# Altium PCB LINEAR POWER SUPPLY 0-30V_v1.PcbDoc
Units mm, origin at the board's own origin, x right, y up, seen from the top; angles counter-clockwise.
Board outline 115 x 60 mm, 2 copper layers (Top Layer, Bottom Layer); 52 components, 32 nets, 135 pads, 0 vias.
Unrouted connection lines stored in the file: 1.
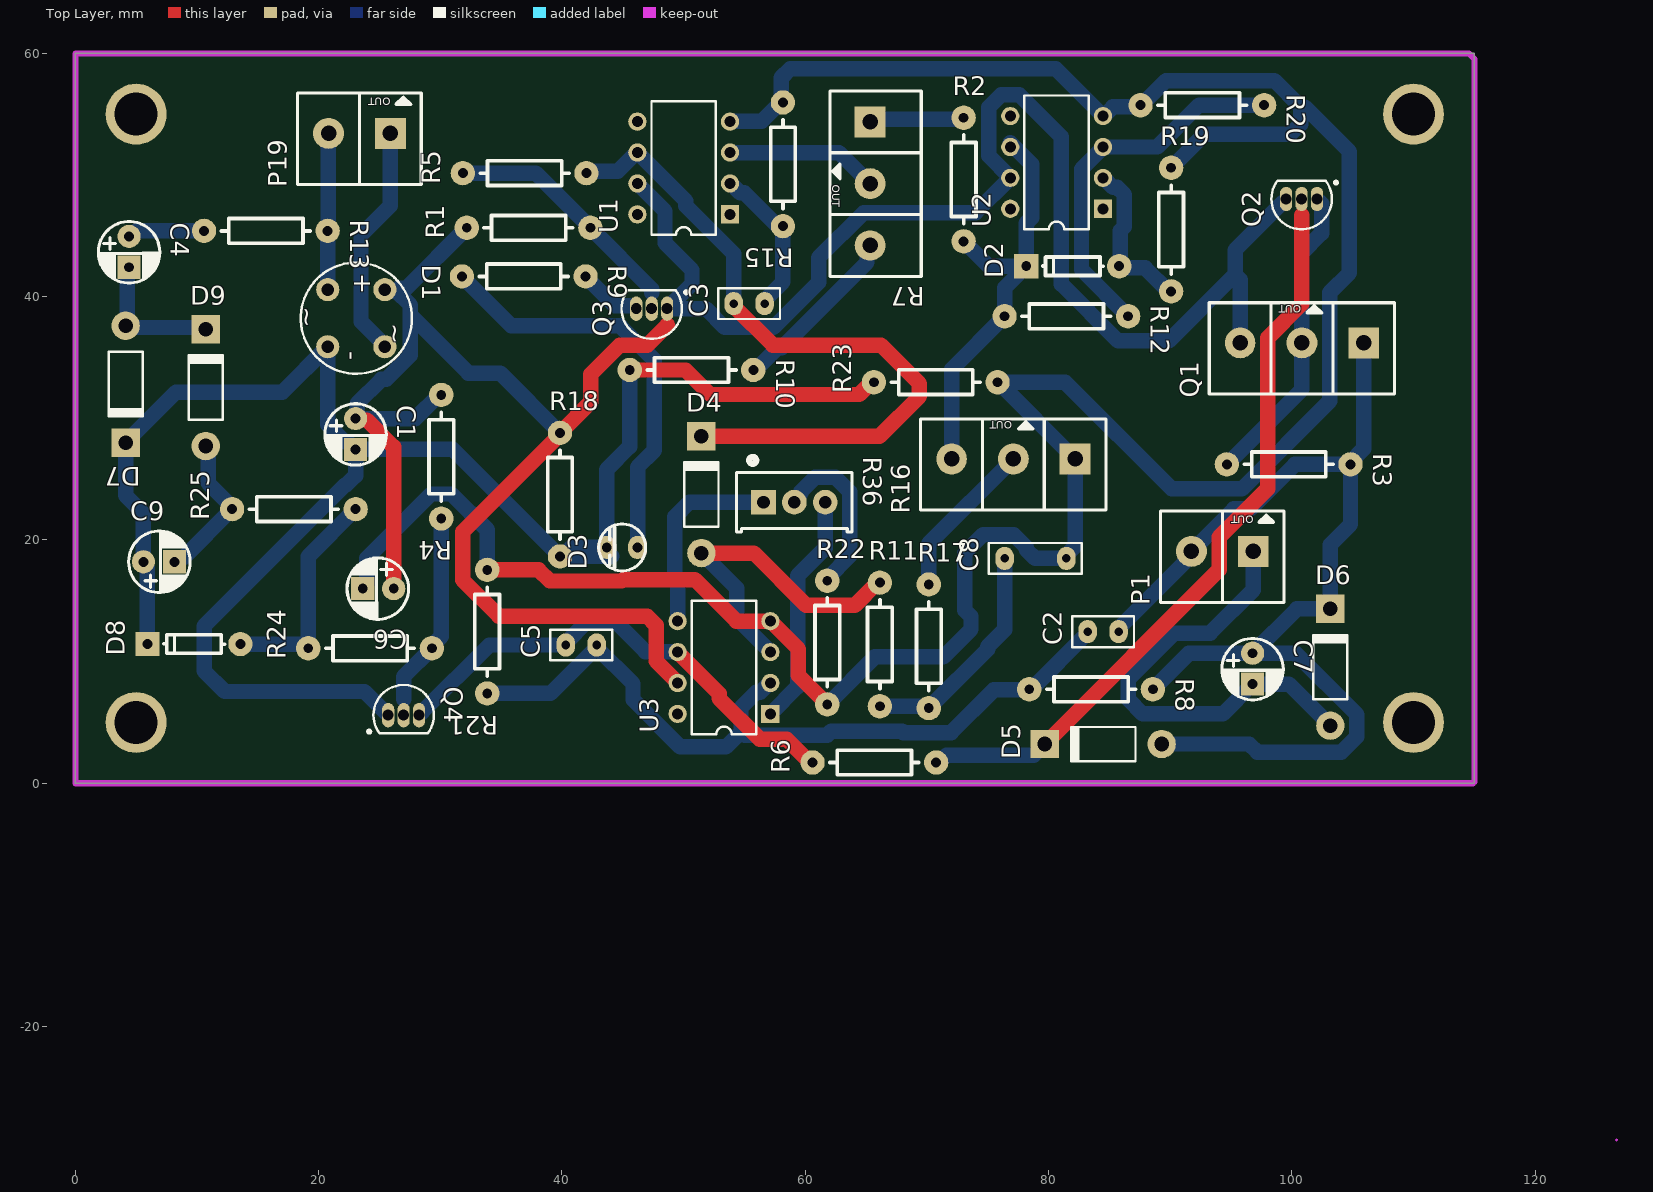
[diagram p0: Top Layer view]
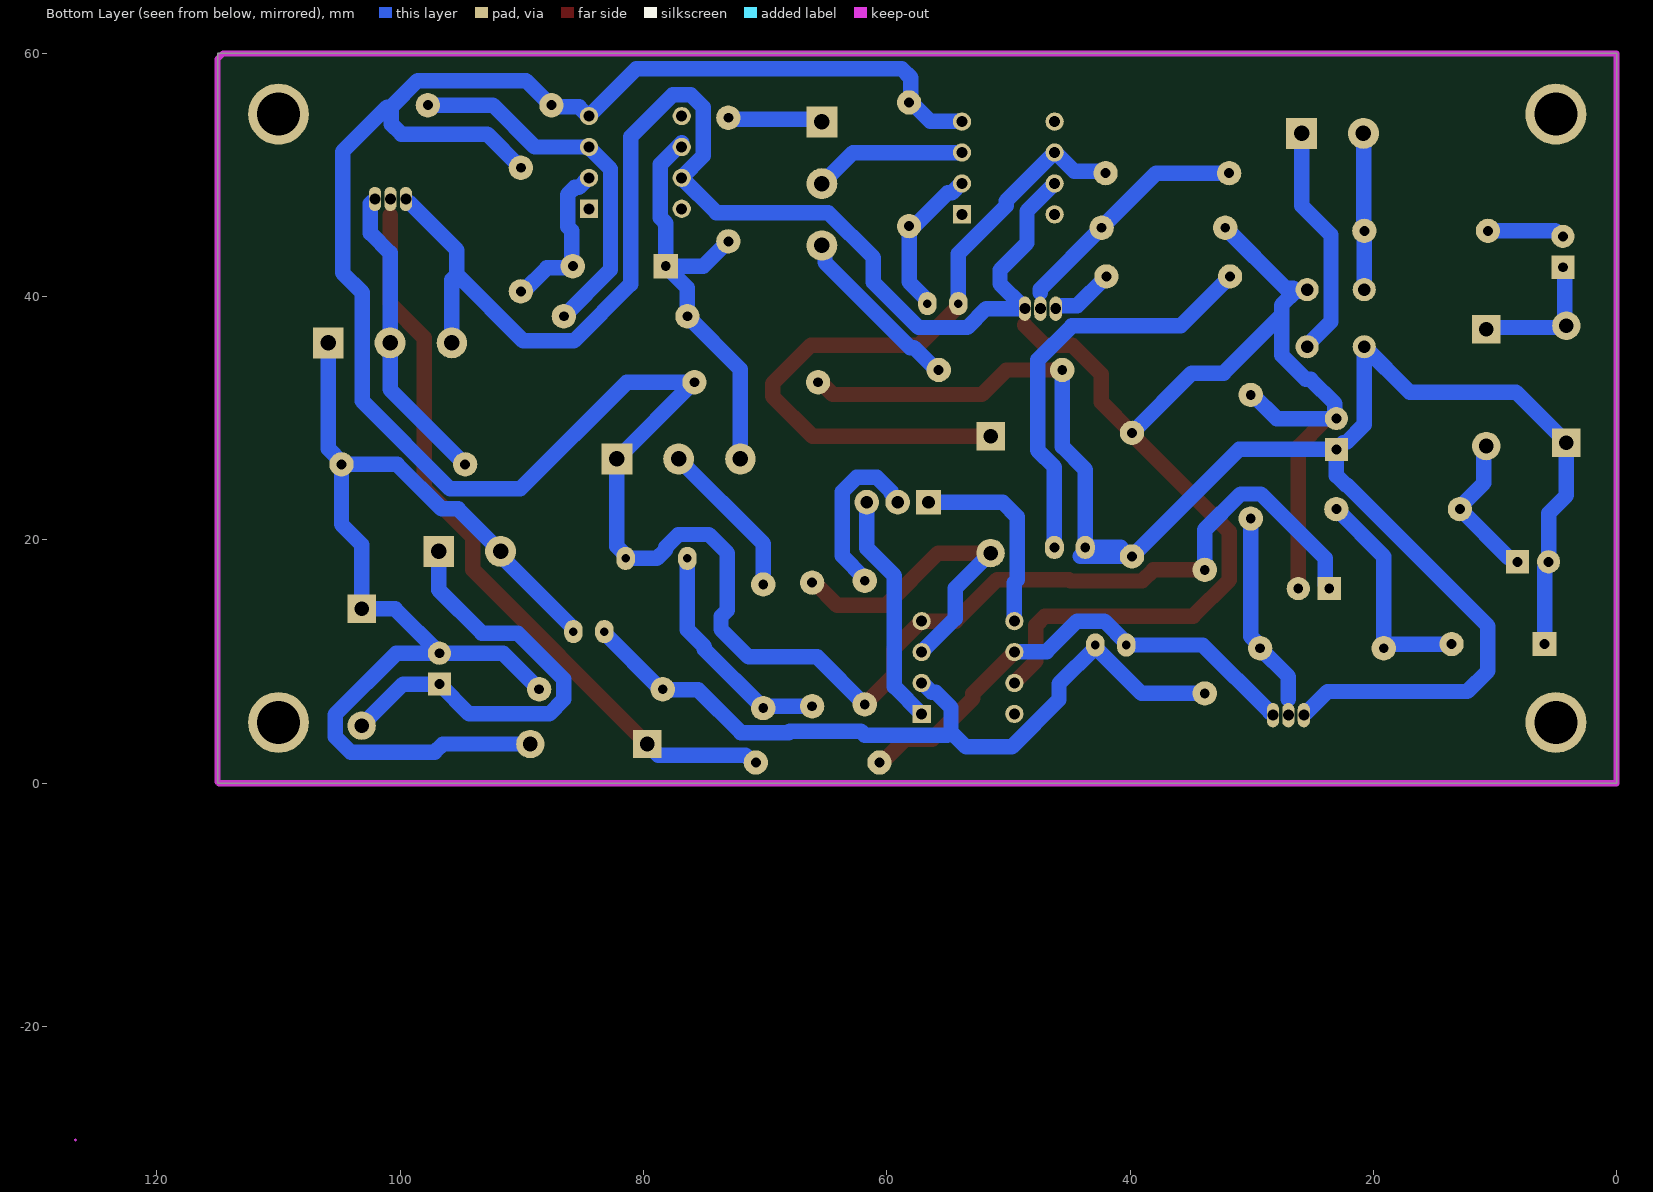
[diagram p1: Bottom Layer view, seen from below]
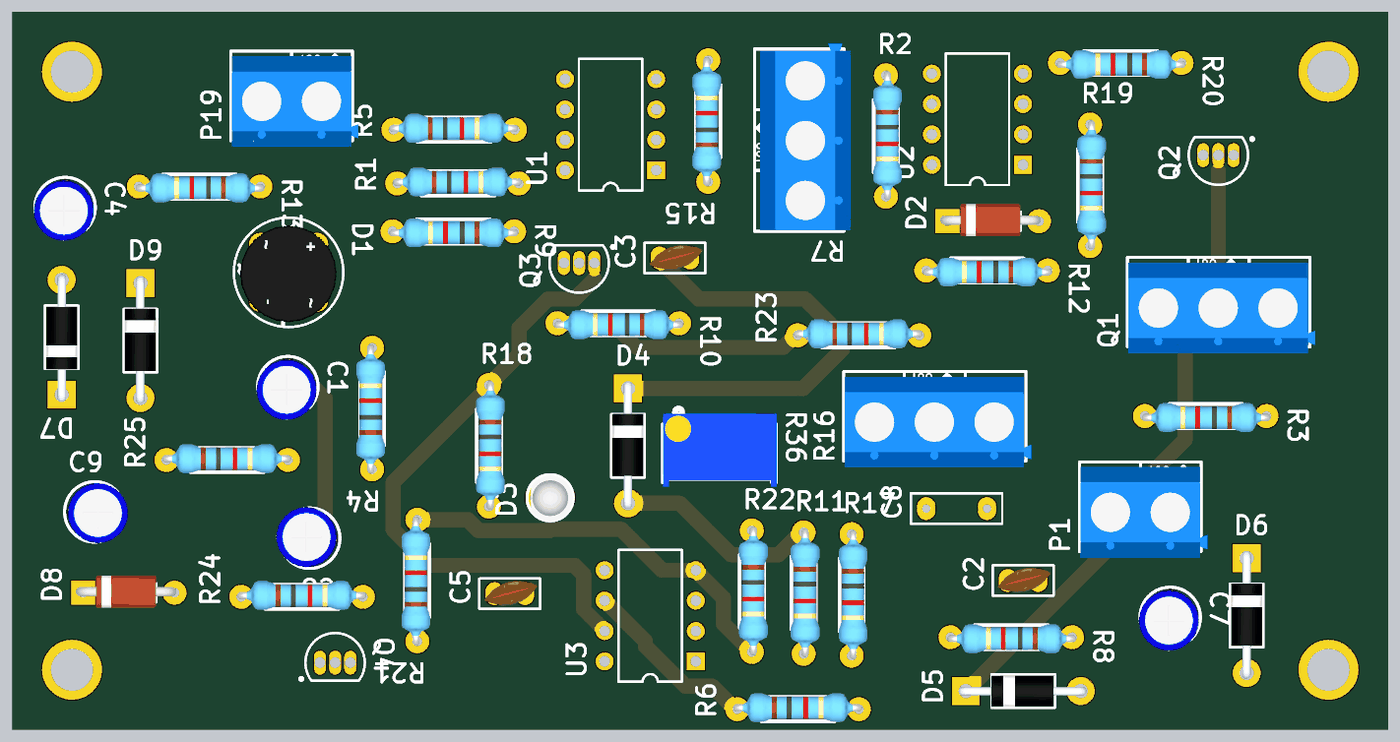
[diagram p2: 3D render of the assembled board from above, using the file's embedded part models]

## Layer stack, top to bottom
Top Solder: solder mask 0.0102, Solder Resist, Dk 3.5
Top Layer: signal copper 0.0356
Dielectric 1: dielectric 0.32, FR-4, Dk 4.8
Bottom Layer: signal copper 0.0356
Bottom Solder: solder mask 0.0102, Solder Resist, Dk 3.5

## Board outline
0,0 115,0 115,60 0,60

## Design rules (kind name [scope] priority, off if disabled: settings)
Clearance POLYGON [InPolygon] p1: gap=0.635 ignorepadtopadclearanceinfootprint=FALSE except(0: Arc-Hole Track-Hole SMDPad-Hole THPad-Hole Via-Hole Fill-Hole Poly-Hole Region-Hole Text-Hole)
Clearance [All] p2: gap=0.381 ignorepadtopadclearanceinfootprint=FALSE except(0: Arc-Hole Track-Hole SMDPad-Hole THPad-Hole Via-Hole Fill-Hole Poly-Hole Region-Hole Text-Hole)
PlaneConnect [All] p1: planeconnectstyle=Direct reliefexpansion=0.508 reliefentries=4 reliefconductorwidth=0.254 reliefairgap=0.254
PolygonConnect [All] p1: connectstyle=Direct reliefconductorwidth=0.254 reliefentries=4 polygonreliefangle="90 Angle" airgapwidth=0.254
RoutingVias [All] p1: holewidth=0.711 width=1.27 viastyle="Through Hole" minholewidth=0.711 minwidth=1.27 maxholewidth=0.711 maxwidth=1.27
SolderMaskExpansion [All] p1: expansion=0.102 istentingtop=FALSE
Width [All] p1: maxlimit=1.27 minlimit=0.254 preferedwidth=2.54
29 further rules are at their usual default settings.

## Components (designator, comment, footprint, x,y, rotation, side; value= is the part's Value field where it differs from the comment)
C1 "4.7uF" "Rad.1/.2-SMALL - duplicate" 23.038,28.708 r270 top
C2 "100pF / CERAMIC" RAD-0.1_cap 84.48,12.464 r180 top
C3 "330 pf /CERAMIC" RAD-0.1_cap 55.383,39.429 r180 top
C4 "47uF/50v" "Rad.1/.2-SMALL - duplicate" 4.421,43.683 r270 top
C5 "100PF / CERAMIC" RAD-0.1_cap 41.582,11.364 r180 top
C6 "200 nf / POLYESTER" "Rad.1/.2-SMALL - duplicate" 24.901,15.998 r180 top
C7 "10uF/50" "Rad.1/.2-SMALL - duplicate" 96.768,9.417 r270 top
C8 "100nF / POLYESTER" "RAD-0.2- duplicate" 81.464,18.479 r180 top
C9 "47uF/50v" "Rad.1/.2-SMALL - duplicate" 6.873,18.201 r0 top
D1 "MB6S" Bridge 23.1,38.229 r270 top
D2 "5.6V" DIODE_ZENER.AXIAL0.3 85.805,42.501 r180 top
D3 "RED" "Led_3mil - RED" 43.684,19.382 r90 top
D4 "1N4148" Dioad_1n400x_2 51.467,23.72 r90 top
D5 "1N4148" Dioad_1n400x_2 84.495,3.224 r180 top
D6 "1N4001" Dioad_1n400x_2 103.162,9.537 r90 top
D7 "1N4148" Dioad_1n400x_2 4.135,32.803 r270 top
D8 "5.6V" DIODE_ZENER.AXIAL0.3 13.572,11.443 r180 top
D9 "1N4148" Dioad_1n400x_2 10.72,32.517 r90 top
P1 "Blue Connector 1*2 -kf301" "Blue Connector 1*2 -kf301" 99.364,22.868 r180 top
P19 "24VDC/3A" "Blue Connector 1*2 -kf301" 28.435,57.228 r180 top
Q1 "2N3055" "Blue Connector 1*3 -kf301" 108.442,39.995 r180 top
Q2 "2N2219" TO-92A 100.797,48.024 r90 top
Q3 "BC557" TO-92A 47.379,39.006 r90 top
Q4 "BC548" TO-92A 26.988,5.593 r270 top
R1 "2.2K" "AXIAL0.4 - 1k" 42.337,45.659 r180 top
R2 "56K" "AXIAL0.4 - 1k" 73.016,44.545 r90 top
R3 "1K" "AXIAL0.4 - 1k" 94.658,26.213 r0 top
R4 "10K" "AXIAL0.4 - 1k" 30.083,31.92 r270 top
R5 "10K" "AXIAL0.4 - 1k" 42.013,50.149 r180 top
R6 "1K" "AXIAL0.4 - 1k" 70.757,1.705 r180 top
R7 "10k" "Blue Connector 1*3 -kf301" 61.535,56.898 r270 top
R8 "56K" "AXIAL0.4 - 1k" 78.413,7.724 r0 top
R9 "3.9K" "AXIAL0.4 - 1k" 31.783,41.657 r0 top
R10 "33R" "AXIAL0.4 - 1k" 45.571,33.969 r0 top
R11 "2.2K" "AXIAL0.4 - 1k" 66.137,6.333 r90 top
R12 "10K" "AXIAL0.4 - 1k" 76.384,38.383 r0 top
R13 "82R/1W" "AXIAL0.4 - 1k" 10.581,45.401 r0 top
R15 "10K" "AXIAL0.4 - 1k" 58.169,55.956 r270 top
R16 "10k" "Blue Connector 1*3 -kf301" 84.72,30.453 r180 top
R17 "27R" "AXIAL0.4 - 1k" 70.152,6.178 r90 top
R18 "2.2K/1W" "AXIAL0.4 - 1k" 39.84,18.642 r90 top
R19 "4.7K" "AXIAL0.4 - 1k" 90.073,40.428 r90 top
R20 "10K" "AXIAL0.4 - 1k" 87.56,55.734 r0 top
R21 "27R" "AXIAL0.4 - 1k" 33.859,17.542 r270 top
R22 "270K" "AXIAL0.4 - 1k" 61.812,6.487 r90 top
R23 "0.47R /5W" "AXIAL0.4 - 1k" 75.805,32.962 r180 top
R24 "1.5K" "AXIAL0.4 - 1k" 29.31,11.094 r180 top
R25 "220R" "AXIAL0.4 - 1k" 23.047,22.532 r180 top
R36 "100k/multiterun" MULTITERN 54.354,20.652 r0 top
U1 "TL081ACN" DIP8 50.01,50.572 r90 top
U2 "TL081ACN" DIP8 80.663,51.029 r90 top
U3 "TL081ACN" DIP8 53.32,9.511 r90 top

## Footprints (in the part's own frame and the unit in brackets; to place one, negate y for a bottom-side part, rotate by r counter-clockwise, add the part's x,y. Pads: shape width x height; smd on the part's side, far side on the other; paste and mask are expansions set on the pad)
"AXIAL0.4 - 1k" [mm]
  round 2 hole 0.813: 1(0,0) 2(10.16,0)
  silkscreen extent 1.44,-1.02 8.73,1.02, body extent -0.26,-1.33 10.5,1.07, height 2.41
"Blue Connector 1*2 -kf301" [mm]
  rect 2.54x2.54 hole 1.27: 1(2.54,3.81)
  round 2.54 hole 1.27: 2(7.62,3.81)
  silkscreen extent 0,0.5 10.16,8, body extent -0.51,0.9 10.09,8.5, height 10
"Blue Connector 1*3 -kf301" [mm]
  rect 2.54x2.54 hole 1.27: 1(2.534,3.798)
  round 2.54 hole 1.27: 2(7.614,3.798)
  oval 2.5x2.54 hole 1.27: 3(12.694,3.798)
  silkscreen extent -0.01,0.5 15.23,8, body extent -0.44,0.95 15.16,8.55, height 10
Bridge [mm]
  round 1.905 hole 1.016: 1(-2.35,2.35) 2(-2.35,-2.35) 3(2.35,-2.35) 4(2.35,2.35)
  silkscreen extent -4.57,-4.57 4.57,4.57, body extent -3.92,-4.06 4.18,4.04, height 5.21
Dioad_1n400x_2 [mm] "Diode, Axial; Body 5.2 x 2.7 mm (LxDia. max), Lead Dia. 0.86 mm (max)"
  round 2.337 hole 1.2: 1(-4.8,0)
  rect 2.337x2.337 hole 1.2: 2(4.8,0)
  silkscreen extent -2.65,-1.4 2.75,1.4, body extent -5.27,-1.29 5.43,1.32, height 1.3
DIODE_ZENER.AXIAL0.3 [mm]
  round 2 hole 0.813: A(0,0)
  rect 2x2 hole 0.813: K(7.642,0)
  silkscreen extent 1.31,-0.76 6.29,0.76, body extent -0.14,-1.44 8.27,1.23, height 2.83
DIP8 [mm] "DIP; 8 Leads; Row Spacing 7.62 mm; Pitch 2.54 mm"
  rect 1.5x1.5 hole 0.9: 1(-3.81,-3.81)
  round 1.5 hole 0.9: 2(-1.27,-3.81) 3(1.27,-3.81) 4(3.81,-3.81) 5(3.81,3.81) 6(1.27,3.81) 7(-1.27,3.81) 8(-3.81,3.81)
  silkscreen extent -5.5,-2.65 5.5,2.65
"Led_3mil - RED" [mil]
  oval 75x62 hole 32: 1(0,-100) 2(0,0)
  silkscreen extent -76,-126 76,26, body extent -76,-125 74,12, height 216
MULTITERN [mil]
  rect 80x80 hole 41: 1(87.01,96.46)
  round 80 hole 41: 2(187.01,96.46) 3(287.01,96.46)
  silkscreen extent 0,0 374,243, body extent 1,-13 376,227, height 455
RAD-0.1_cap [mm] "Radial Cap, Thru-Hole; 2 Leads; 0.1 in Pin Spacing"
  oval 1.524x1.905 hole 0.7: 1(-1.27,0) 2(1.27,0)
  silkscreen extent -2.54,-1.27 2.54,1.27, body extent -2.3,-1.08 2.1,1, height 5.08
"RAD-0.2- duplicate" [mm] "Radial Cap, Thru-Hole; 2 Leads; 0.1 in Pin Spacing"
  oval 1.524x1.905 hole 0.7: 1(0,0) 2(5.08,0)
  silkscreen extent -1.27,-1.27 6.38,1.27
"Rad.1/.2-SMALL - duplicate" [mil]
  round 75 hole 32: 1(-50,0)
  rect 75x75 hole 32: 2(50,0)
  silkscreen extent -98,-103 101,103, body extent -88,-103 111,95, height 454
TO-92A [mm] "TO, Flat Index; 3 In-Line, Axial Leads; Body Dia. 4.5mm; Leads 0.51 x 0.48 mm (max)"
  oval 2x1 hole 0.9: 1(0,-1.27) 2(0,0) 3(0,1.27)
  silkscreen extent -2.48,-2.96 1.5,2.48, body extent -2.48,-2.5 1.5,2.5, height 6.86

## Part data
C1 C4 C6 C7 C9: library part "Cap Pol1", "Polarized Capacitor (Radial)", LatestRevisionDate=17-Jul-2002, LatestRevisionNote="Re-released for DXP Platform.", PackageDescription="Polarized Capacitor (Radial); 2 Leads", PackageReference=RB7.6-15, Published=8-Jun-2000, Publisher="Altium Limited"
C2 C3 C5 C8: library part Cap, "Capacitor", LatestRevisionDate=17-Jul-2002, LatestRevisionNote="Re-released for DXP Platform.", PackageDescription="Radial Cap, Thru-Hole; 2 Leads; 0.3 in Pin Spacing", PackageReference=RAD-0.3, Published=8-Jun-2000, Publisher="Altium Limited"
D1: library part Bridge1, "Full Wave Diode Bridge", DatasheetVersion=E2732B, LatestRevisionDate=29-May-2009, LatestRevisionNote="Sch pins A & K swapped.", PackageDescription="Bridge Rectifier; 4 Terminals; Body 9.4 x 9.4 mm (typ); Pitch 5.08 mm", PackageReference=D-38, Published=8-Jun-2000, Publisher="Altium Limited"
D2 D8: library part "D Zener", "Zener Diode", LatestRevisionDate=17-Jul-2002, LatestRevisionNote="Re-released for DXP Platform.", PackageDescription="Diode, Thru-Hole; 2 Leads; 0.7 in Pin Spacing", PackageReference=DIODE-0.7, Published=8-Jun-2000, Publisher="Altium Limited"
D3: library part LED0, "Typical INFRARED GaAs LED", LatestRevisionDate=08-Jul-2005, LatestRevisionNote="Mech Layer 1 removed.", PackageDescription="LED; 2 Leads", PackageReference=LED-0, Published=8-Jun-2000, Publisher="Altium Limited"
D4 D5 D6 D7 D9: library part "Diode 1N4007", "1 Amp General Purpose Rectifier", Code_JEDEC=DO-204-AL, ComponentLink1Description="Manufacturer Link", ComponentLink1URL=http://www.fairchildsemi.com/, ComponentLink2Description=Datasheet, ComponentLink2URL=http://www.fairchildsemi.com/ds/1N%2F1N4001.pdf, DatasheetVersion=1998, LatestRevisionDate=17-Jul-2002, LatestRevisionNote="Re-released for DXP Platform.", PackageDescription="Diode, Axial; Body 5.2 x 2.7 mm (LxDia. max), Lead Dia. 0.86 mm (max)", PackageReference=DO-41, PackageVersion=Aug-1999, Published=8-Jun-2000, Publisher="Altium Limited"
P1: library part "Header 2H", LatestRevisionDate=17-Jul-2002, LatestRevisionNote="Re-released for DXP Platform.", Publisher="Altium Limited"
P19: library part "Header 2H", "Blue Connector 1*2 -kf301", LatestRevisionDate=17-Jul-2002, LatestRevisionNote="Re-released for DXP Platform.", Publisher="Altium Limited"
Q1 Q2 Q4: library part 2N3904, "NPN General Purpose Amplifier", ComponentLink1Description="Manufacturer Link", ComponentLink1URL=http://www.fairchildsemi.com/, ComponentLink2Description=Datasheet, ComponentLink2URL=http://www.fairchildsemi.com/ds/2N%2F2N3904.pdf, DatasheetVersion=1997, LatestRevisionDate=15-Jan-2003, LatestRevisionNote="PCB Footprint 'BCY-W3/D4.7' replaced", PackageDescription="TO, Flat Index; 3 In-Line, Axial Leads; Body Dia. 4.5mm; Leads 0.51 x 0.48 mm (max)", PackageReference=TO-92A, PackageVersion=Sep-1998, Published=8-Jun-2000, Publisher="Altium Limited"
Q3: library part 2N3906, "PNP General Purpose Amplifier", ComponentLink1Description="Manufacturer Link", ComponentLink1URL=http://www.fairchildsemi.com/, ComponentLink2Description=Datasheet, ComponentLink2URL=http://www.fairchildsemi.com/ds/2N%2F2N3906.pdf, DatasheetVersion=1997, LatestRevisionDate=15-Jan-2003, LatestRevisionNote="PCB Footprint 'BCY-W3/D4.7' replaced", PackageDescription="TO, Flat Index; 3 In-Line, Axial Leads; Body Dia. 4.5mm; Leads 0.51 x 0.48 mm (max)", PackageReference=TO-92A, PackageVersion=Sep-1998, Published=8-Jun-2000, Publisher="Altium Limited"
R1 R2 R3 R4 R5 R6 R8 R9 R10 R11 R12 R13 R15 R17 R18 R19 R20 R21 R22 R23 R24 R25: library part Res1, "Resistor", LatestRevisionDate=17-Jul-2002, LatestRevisionNote="Re-released for DXP Platform.", PackageDescription="Axial Device, Thru-Hole; 2 Leads; 0.3 in Pin Spacing", PackageReference=AXIAL-0.3, Published=8-Jun-2000, Publisher="Altium Limited"
R7 R16 R36: library part POT
U1 U2 U3: "General-Purpose J-FET Single Operational Amplifier", Code_JEDEC=MO-001-AN, ComponentLink1Description="Manufacturer Link", ComponentLink1URL=http://www.st.com/, ComponentLink2Description=Datasheet, ComponentLink2URL=http://www.st.com/stonline/products/literature/ds/2299/tl081.pdf, DatasheetVersion=Dec-1998, LatestRevisionDate=06-Jun-2005, LatestRevisionNote="Stylized 3D Model Added.", PackageDescription="DIP; 8 Leads; Row Spacing 7.62 mm; Pitch 2.54 mm", PackageReference=DIP8, Published=24-Aug-2001, Publisher="Altium Limited"

## Free pads (board coordinates)
  round 5 hole 3.52: 1(5,55) 2(110,55) 3(5,5) 4(110,5)

## Nets (pads, with @x,y where several pads share a name; then routed paths per layer and width w, separated by ;. In a path a pad name is that pad's centre, name@x,y a point inside that pad or via, vN(x,y) a via of type N, cw(c..) or ccw(c..) an arc to the next point about the centre after c; other vN are vias at no path point)
GND: C6.2 C7.2 C8.1 D6.1 P1.1 R15.1 R16.1 R19.2 R20.1 R21.1 R22.1 R23.1 U1.4 U2.4 U3.4 | length 266.9
  Top Layer w1.27: R21.1 38.089,17.542 39.005,16.626 44.91,16.626 45.021,16.738 50.926,16.738 54.343,13.321 U3.4 59.428,11.023 59.428,8.871 R22.1
  Bottom Layer w1.27: C6.2 23.949,16.315 23.949,18.477 29.248,23.776 30.918,23.776 33.859,20.834 R21.1 ; U1.4 53.864,54.426 56.441,54.426 57.971,55.956 R15.1 58.029,56.096 58.029,57.99 58.773,58.734 80.578,58.734 U2.4 84.535,54.839 85.29,55.595 87.42,55.595 R20.1 87.636,55.734 89.652,57.75 98.555,57.75 100.731,55.574 ; R22.1 65.712,10.387 71.361,10.387 73.626,12.652 73.626,13.709 73.097,14.237 73.097,18.918 74.626,20.447 77.121,20.447 78.162,19.406 78.162,19.223 78.906,18.479 C8.1 81.464,18.738 82.186,19.46 R16.1 R23.1@75.879,32.962 ; R23.1 R23.1@75.879,32.962 ; R19.2 92.837,53.351 99.904,53.351 100.731,54.179 100.731,55.574 ; P1.1 96.824,15.883 93.279,12.338 90.336,12.338 86.557,8.559 86.557,6.889 87.738,5.708 94.329,5.708 C7.2 99.752,8.147 D6.1 ; R23.1@75.879,32.962 81.366,32.962 90.13,24.197 95.892,24.197 103.114,31.419 103.114,40.338 104.732,41.956 104.732,51.912 101.07,55.574 100.731,55.574
NetC1_2: C1.2 C9.1 D1.3 D3.2 D7.2 D8.K Q4.1 R10.1 R18.1 R23.2 | length 151.7
  Top Layer w1.27: R10.1 50.159,33.969 52.175,31.953 64.438,31.953 65.448,32.962 R23.2
  Bottom Layer w1.27: D8.K 5.93,17.703 5.603,18.029 C9.1 5.603,22.187 4.135,23.656 D7.2 8.279,32.147 17.018,32.147 D1.3 20.75,29.482 22.222,28.01 22.466,28.01 C1.2 ; Q4.1@25.472,5.839 23.77,7.541 12.286,7.541 10.584,9.244 10.584,12.921 22.212,24.548 22.294,24.548 23.038,25.292 C1.2 ; D3.2@44.082,18.642 R18.1@40.038,18.642 ; R10.1 45.571,27.672 43.684,25.786 D3.2 40.777,19.382 R18.1@40.038,18.642 ; C1.2 31.044,27.438 R18.1 R18.1@40.038,18.642
NetC2_1: C2.1 C7.1 D5.1 D6.2 P1.2 Q1.1 R3.2 R8.2 | length 94.8
  Bottom Layer w1.27: C2.1 85.75,12.724 91.879,18.853 91.948,18.853 91.948,19.262 95.232,22.546 96.576,22.546 100.243,26.213 R3.2 ; R8.2 91.536,10.687 C7.1 ; D5.1 96.489,3.224 97.161,2.553 104.067,2.553 105.346,3.832 105.346,5.642 100.301,10.687 C7.1 ; Q1.1 105.908,27.5 104.818,26.411 R3.2 ; C7.1 100.418,14.337 D6.2 103.162,19.615 104.818,21.271 R3.2
NetC2_2: C2.2 C5.1 R8.1 R21.2 U3.2 | length 64.8
  Bottom Layer w1.27: R21.2 39.06,7.382 C5.1@42.852,11.174 ; C5.1 C5.1@42.852,11.174 ; U3.2 57.068,8.241 56.294,7.467 55.959,7.467 54.719,6.227 54.719,4.229 ; C2.2 83.21,12.343 78.591,7.724 R8.1 78.374,7.685 75.508,7.685 71.986,4.162 68.073,4.162 67.964,4.272 62.13,4.272 61.793,3.935 55.013,3.935 54.719,4.229 ; C5.1@42.852,11.174 45.84,8.186 45.84,6.874 49.725,2.988 53.479,2.988 54.719,4.229
NetC3_1: C3.1 R15.2 U1.2 | length 12.8
  Bottom Layer w1.27: U1.2 53.882,49.302 54.656,48.528 54.991,48.528 57.583,45.936 58.029,45.936 R15.2 58.169,41.204 56.653,39.688 C3.1
NetC3_2: C3.2 D4.2 R5.1 U1.6 | length 59
  Top Layer w1.27: D4.2 66.103,28.52 69.382,31.8 69.382,32.852 66.225,36.01 57.341,36.01 54.113,39.238 C3.2
  Bottom Layer w1.27: R5.1 42.153,50.289 44.584,50.289 46.138,51.842 U1.6 50.183,47.859 50.183,47.462 54.113,43.532 C3.2
NetC4_1: C4.1 R13.1 | length 6.3
  Bottom Layer w1.27: C4.1 4.593,44.953 5.041,45.401 R13.1
NetC4_2: C4.2 D7.1 D9.2 | length 11.6
  Bottom Layer w1.27: C4.2 4.278,42.27 4.278,37.746 D7.1 4.278,37.46 10.577,37.46 D9.2
NetC5_2: C5.2 Q4.3 R6.2 U3.6 | length 40.3
  Top Layer w1.27: U3.6 52.913,7.378 52.913,6.981 56.262,3.632 58.472,3.632 60.4,1.705 R6.2
  Bottom Layer w1.27: Q4.3@28.504,5.839 34.029,11.364 C5.2 40.312,11.529 42.115,13.333 44.356,13.333 46.864,10.825 49.466,10.825 U3.6
NetC8_2: C8.2 R11.1 R17.1 | length 19
  Bottom Layer w1.27: R11.1 69.8,6.333 69.955,6.178 R17.1 74.985,11.011 74.985,11.218 76.384,12.617 C8.2
NetC9_2: C9.2 D9.1 R25.2 | length 12.6
  Bottom Layer w1.27: C9.2 8.461,18.519 8.873,18.519 R25.2 12.887,22.716 10.924,24.678 10.924,27.513 D9.1
NetD1_2: D1.2 P19.2 R13.2 | length 12.9
  Bottom Layer w1.27: D1.2 20.746,40.584 20.746,45.396 R13.2 20.778,45.438 20.778,53.381 P19.2
NetD1_4: D1.4 P19.1 | length 19.4
  Bottom Layer w1.27: D1.4 25.45,35.983 23.482,37.952 23.482,45.067 25.895,47.48 P19.1
NetD2_A: D2.A R19.1 U2.2 | length 13.5
  Bottom Layer w1.27: U2.2 84.535,49.759 85.309,48.985 85.643,48.985 86.239,48.39 86.239,45.761 85.883,45.406 85.883,42.579 D2.A 85.945,42.361 87.943,42.361 89.876,40.428 R19.1
NetD2_K: D2.K R2.1 R12.1 R16.3 U2.6 | length 35.8
  Bottom Layer w1.27: R16.3 72.026,34.025 R12.1 76.384,40.722 D2.K ; R2.1 73.035,44.545 75.08,42.501 D2.K ; U2.6 76.853,52.632 78.619,50.866 78.619,46.488 78.163,46.032 D2.K
NetD3_1: D3.1 R9.1 | length 34.6
  Bottom Layer w1.27: R9.1 35.84,37.601 44.789,37.601 47.587,34.804 47.587,27.354 46.224,25.991 D3.1
NetD4_1: D4.1 R11.2 U3.3 | length 27.7
  Top Layer w1.27: D4.1 55.772,18.92 60.061,14.631 64.077,14.631 65.939,16.493 R11.2
  Bottom Layer w1.27: D4.1 54.374,16.014 54.374,13.537 U3.3
NetD5_2: D5.2 Q2.2 R6.1 | length 61.5
  Top Layer w1.27: D5.2 94.03,17.559 94.03,20.24 98.014,24.225 98.014,36.616 100.797,39.399 100.797,46.696
  Bottom Layer w1.27: R6.1@70.978,1.872 71.175,1.872 71.612,2.309 78.78,2.309 D5.2
NetD8_A: D8.A R24.2 R25.1 | length 18.8
  Bottom Layer w1.27: D8.A 18.604,11.443 18.953,11.094 R24.2 19.15,18.636 R25.1
NetQ1_2: Q1.2 Q2.1 R3.1 | length 24.8
  Bottom Layer w1.27: R3.1 100.828,32.383 Q1.2 100.828,43.602 102.438,45.213 102.438,47.653 Q2.1@102.313,47.778
NetQ3_2: Q3.2 R1.1 R5.2 | length 19.8
  Bottom Layer w1.27: R5.2 37.846,50.149 R1.1 47.379,40.617 47.379,40.334
NetQ3_3: Q3.3 R9.2 | length 4.9
  Bottom Layer w1.27: R9.2 44.349,39.252 Q3.3@45.863,39.252
NetQ4_2: Q4.2 R4.2 R24.1 | length 16.1
  Bottom Layer w1.27: 26.988,6.921 26.988,8.772 R24.1 29.31,11.292 30.083,12.064 R4.2
NetR2_2: R2.2 R7.1 | length 7.8
  Bottom Layer w1.27: R7.1 65.534,54.565 72.877,54.565 R2.2
NetR7_2: R7.2 U1.3 | length 12.6
  Bottom Layer w1.27: U1.3 62.775,51.842 R7.2
NetR7_3: R7.3 R10.2 | length 14.5
  Bottom Layer w1.27: R10.2 55.928,33.969 57.769,35.809 58.073,35.809 65.077,42.813 65.077,43.949 R7.3
NetR12_2: R12.2 R20.2 U2.3 | length 30.9
  Bottom Layer w1.27: R12.2 82.707,42.221 82.707,50.491 84.473,52.257 U2.3 88.933,52.299 92.369,55.734 R20.2
NetR16_2: R16.2 R17.2 | length 13.2
  Bottom Layer w1.27: R17.2 70.152,19.702 R16.2
NetR22_2: R22.2 R36.2 | length 14.2
  Bottom Layer w1.27: R36.2 59.104,23.309 59.612,23.817 59.612,23.944 60.802,25.134 62.485,25.134 63.676,23.944 63.676,18.708 61.812,16.845 R22.2
NetR36_1: R36.1 U3.5 | length 16.5
  Bottom Layer w1.27: U3.5 49.51,16.49 49.282,16.718 49.282,21.906 50.479,23.102 R36.1
NetR36_3: R36.3 U3.1 | length 19.3
  Bottom Layer w1.27: U3.1 59.371,7.942 59.371,17.058 61.644,19.33 R36.3
VCC: C1.1 C6.1 D1.1 Q1.3 Q2.3 Q3.1 R1.2 R4.1 R18.2 U1.7 U2.7 U3.7 | length 219.7
  Top Layer w1.27: C1.1 23.159,29.857 23.961,29.857 26.171,27.647 C6.1 ; 48.649,37.678 48.649,37.632 47.001,35.985 44.736,35.985 42.358,33.607 42.358,31.32 R18.2 39.84,28.666 31.843,20.669 31.843,16.707 34.818,13.733 47,13.733 47.744,12.989 47.744,10.049 49.51,8.283 U3.7
  Bottom Layer w1.27: D1.1 25.572,40.457 26.383,40.457 27.546,39.294 27.546,38.484 ; 26.579,40.7 27.218,40.7 R1.2 ; R4.1 29.885,31.92 27.944,29.978 C1.1 23.159,30.1 23.159,31.206 25.151,33.198 25.554,33.198 27.546,35.19 27.546,38.484 ; R18.2 34.93,33.713 32.317,33.713 27.546,38.484 ; U1.7 48.473,47.029 48.473,44.408 50.693,42.188 50.693,41.05 Q3.1@48.895,39.252 ; Q3.1@48.895,39.006 51.831,39.006 53.376,37.46 57.389,37.46 61.102,41.173 61.102,43.199 64.815,46.912 74.005,46.912 U2.7 76.853,49.802 75.087,51.568 75.087,55.571 76.121,56.605 77.584,56.605 81.056,53.134 81.056,41.021 85.709,36.367 89.879,36.367 95.332,41.82 ; Q1.3 95.748,41.404 95.332,41.82 ; Q2.3@99.281,47.778 95.332,43.829 95.332,41.82
pads on no net: U1.1 U1.5 U1.8 U2.1 U2.5 U2.8 U3.8

## Keep-outs
Keep-Out Layer:
  lines w0.254: 126.699,-29.327 126.699,-29.327 ; 126.699,-29.327 126.699,-29.327 ; 126.699,-29.327 126.699,-29.327
  lines w0.5: 0,0 114.885,0 115,0.114 115,59.546 114.546,60 0,60 0,0

## Text inside footprints (layer, text, board x,y; h text height)
D1: Top Overlay "-" at 22.046,35.506 h1.5 r270; Top Overlay "+" at 22.948,41.927 h1.5 r270; Top Overlay "~" at 18.386,39.171 h1.5 r270; Top Overlay "~" at 25.59,37.797 h1.5 r270
P1: Top Overlay "OUT" at 96.847,21.999 h0.64 r180
P19: Top Overlay "OUT" at 25.918,56.359 h0.64 r180
Q1: Top Overlay "OUT" at 100.752,39.296 h0.64 r180
R7: Top Overlay "OUT" at 62.234,49.208 h0.64 r270
R16: Top Overlay "OUT" at 77.03,29.754 h0.64 r180